# EAGLE board StepperSynth2.3_Motor (EAGLE 9.2.2)
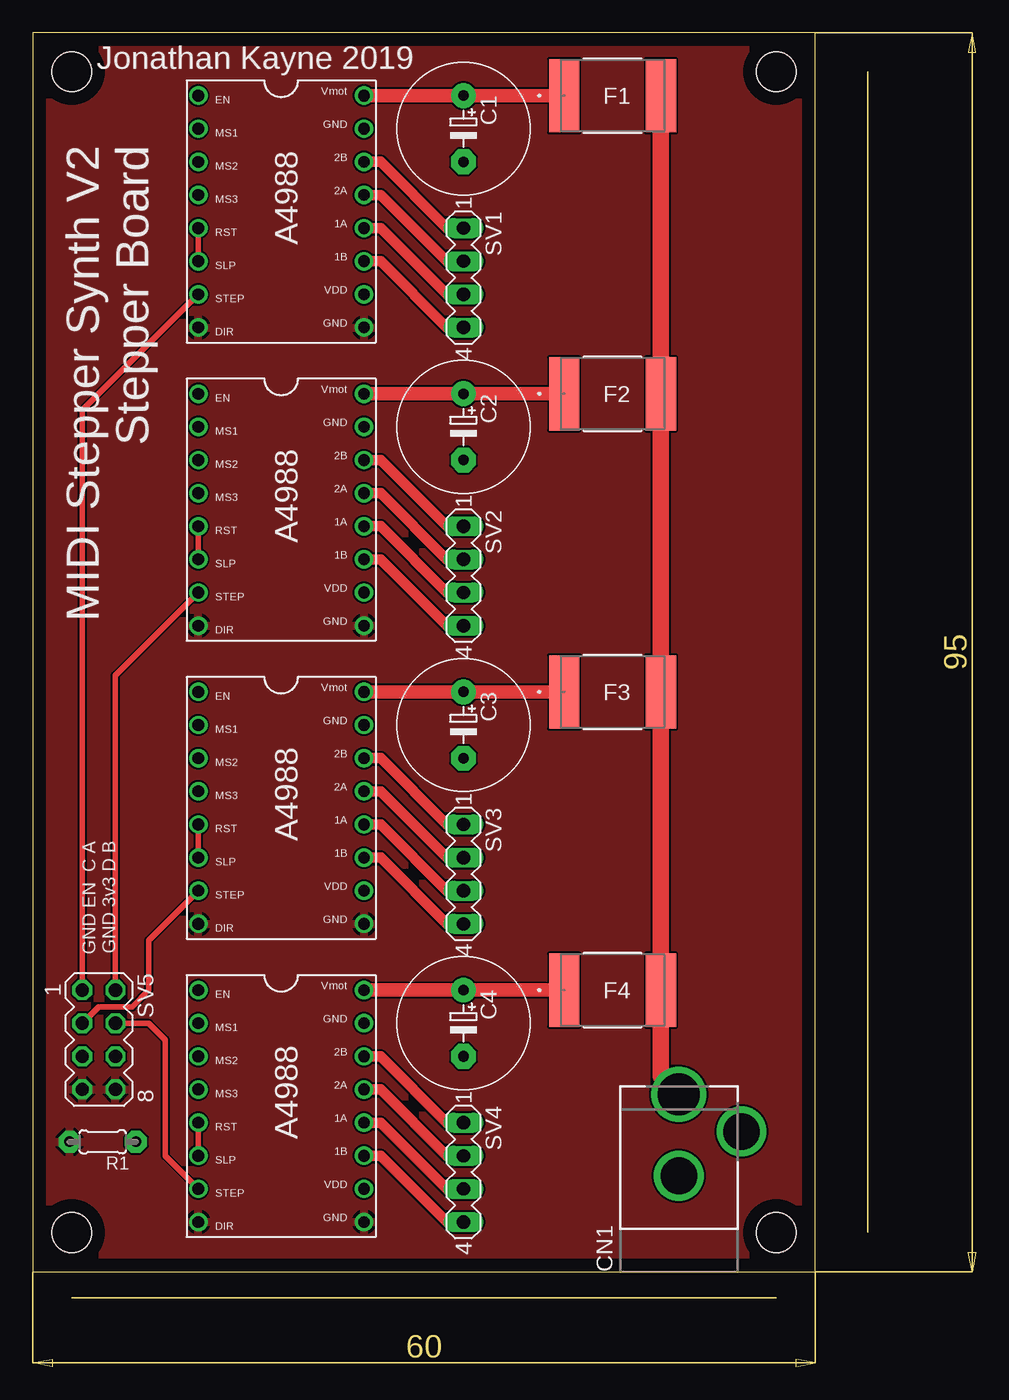
[diagram p0: board, top side]
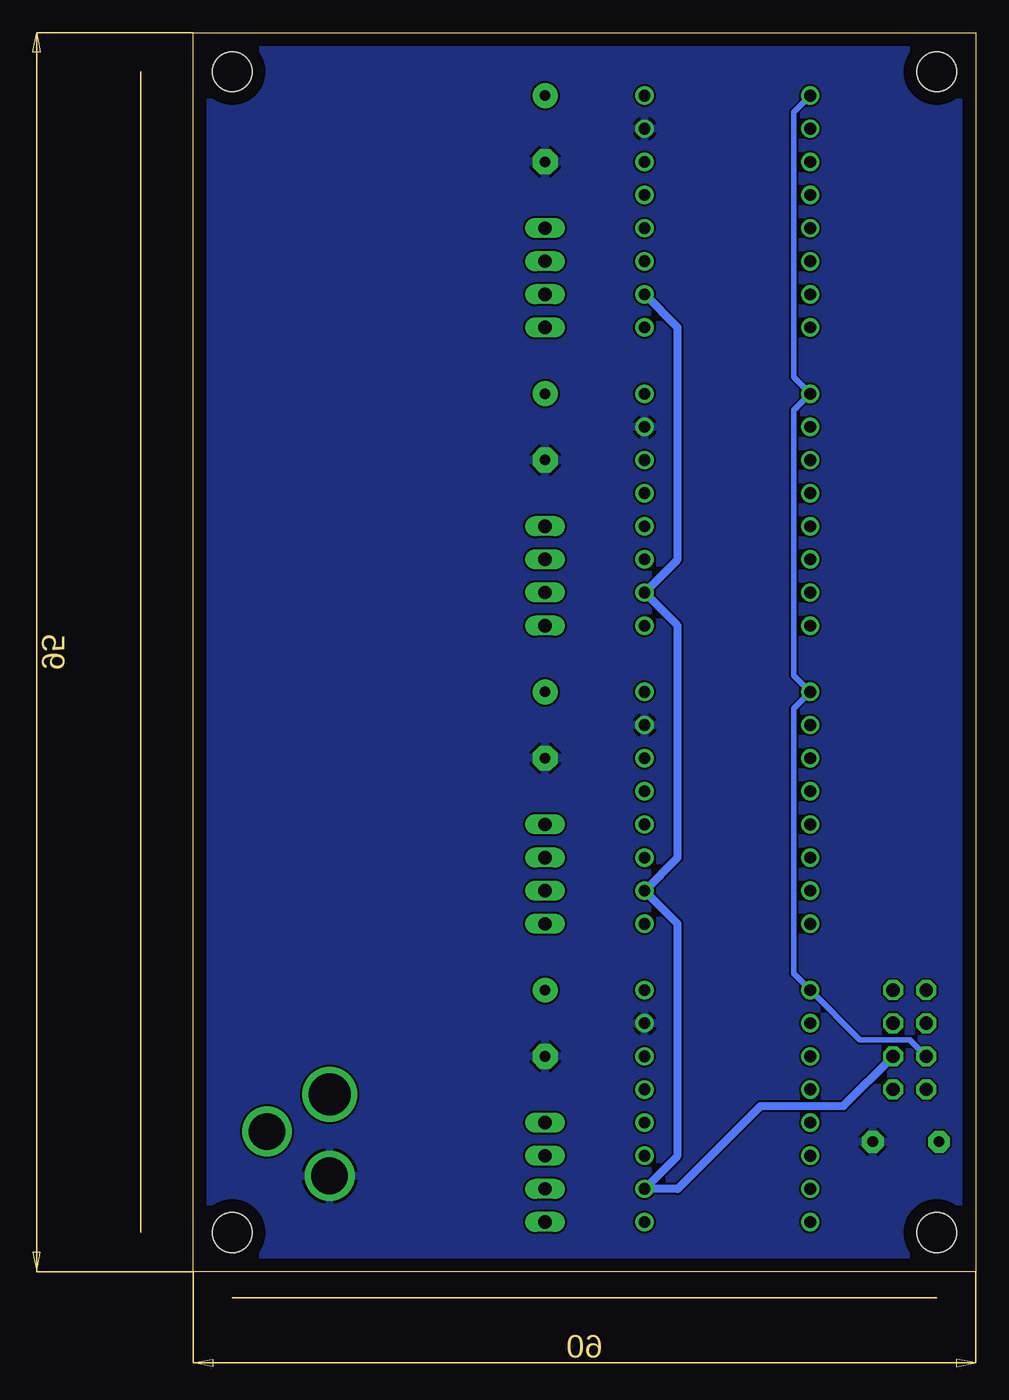
[diagram p1: board, bottom side, seen from below]

Size 60 x 95 mm. Coordinates in mm from the lower left corner, seen from the top.
Outline: 0,0 60,0 60,95 0,95 0,0
Copper layers (1*16): Top 0.035mm / dielectric 1.5mm / Bottom 0.035mm
Design rules "default": minimum track width 6mil, minimum drill 0.35mm, track to track 6mil, track to pad 6mil, pad to pad 6mil, via to via 6mil, smd to smd 6mil, copper to edge 40mil, drill to drill 6mil, minimum pad ring 10mil, minimum via ring 8mil, stop-mask expansion 4mil, vias tented up to drill 0mil, thermal gap 10mil
Holes 3.05 mm at 3,3 3,92 57,3 57,92

## Footprints (pad centres in the part's own frame; a part is rotated, then mirrored left to right if it is on the bottom)
E5-10 = drill 0.813 pad 1.905: + -2.54,0 | drill 0.813 pad 1.905 octagon: - 2.54,0
DCJACK_2MM_PTH = drill 2.8: GND 0,7.35; GNDBREAK 4.8,10.75 | drill 3.2: PWR 0,13.6
0ZCF = smd 2.311 x 5.613: 1 -3.708,0; 2 3.708,0
0204/5 = drill 0.813 pad 1.676 octagon: 1 -2.54,0; 2 2.54,0
MA04-1 = drill 1.016 long: 1 -3.81,0; 2 -1.27,0; 3 1.27,0; 4 3.81,0
MA04-2 = drill 1.016 octagon: 1 -3.81,-1.27; 2 -3.81,1.27; 3 -1.27,-1.27; 4 -1.27,1.27; 5 1.27,-1.27; 6 1.27,1.27; 7 3.81,-1.27; 8 3.81,1.27
A4988BREAKOUT = drill 0.9: 1A 8.89,1.27; 1B 11.43,1.27; 2A 6.35,1.27; 2B 3.81,1.27; DIR 16.51,-11.43; EN -1.27,-11.43; GND 16.51,1.27; MOTGND 1.27,1.27; MS1 1.27,-11.43; MS2 3.81,-11.43; MS3 6.35,-11.43; RST 8.89,-11.43; SLP 11.43,-11.43; STEP 13.97,-11.43; VDD 13.97,1.27; VMOT -1.27,1.27

## Placement (x,y rotation side)
C1  47uF  [E5-10]  33.02,87.63 270 top
C2  47uF  [E5-10]  33.02,64.77 270 top
C3  47uF  [E5-10]  33.02,41.91 270 top
C4  47uF  [E5-10]  33.02,19.05 270 top
CN1  [DCJACK_2MM_PTH]  49.53,0 0 top
F1  PTC2920_0ZCF  [0ZCF]  44.45,90.17 0 top
F2  PTC2920_0ZCF  [0ZCF]  44.45,67.31 0 top
F3  PTC2920_0ZCF  [0ZCF]  44.45,44.45 0 top
F4  PTC2920_0ZCF  [0ZCF]  44.45,21.59 0 top
R1  0  [0204/5]  5.37,9.96 180 top
SV1  [MA04-1]  33.02,76.2 270 top
SV2  [MA04-1]  33.02,53.34 270 top
SV3  [MA04-1]  33.02,30.48 270 top
SV4  [MA04-1]  33.02,7.62 270 top
SV5  [MA04-2]  5.08,17.78 270 top
U$1  A4988BREAKOUT  [A4988BREAKOUT]  24.13,88.9 270 top
U$2  A4988BREAKOUT  [A4988BREAKOUT]  24.13,66.04 270 top
U$3  A4988BREAKOUT  [A4988BREAKOUT]  24.13,43.18 270 top
U$4  A4988BREAKOUT  [A4988BREAKOUT]  24.13,20.32 270 top

## Library data of the parts
C1-C4 = Capacitor
CN1 R1 = adafruit
F1-F4 = PTC Fuse - 0ZCF0150FF2C; MANUFACTURER_PART_NUMBER: 0ZCF0150FF2C; VENDOR: Belfuse
SV1-SV5 = con-lstb; OC_FARNELL: unknown; OC_NEWARK: unknown
U$1-U$4 = RepRapjr

## Nets
+3V3: SV5.6 U$1.VDD U$2.VDD U$3.VDD U$4.VDD
+12V: CN1.PWR F1.2 F2.2 F3.2 F4.2
AGND: C1.- C2.- C3.- C4.- CN1.GND R1.1 U$1.MOTGND U$2.MOTGND U$3.MOTGND U$4.MOTGND
DGND: R1.2 SV5.7 SV5.8 U$1.DIR U$1.GND U$2.DIR U$2.GND U$3.DIR U$3.GND U$4.DIR U$4.GND
EN: SV5.5 U$1.EN U$2.EN U$3.EN U$4.EN
GNDBREAK: CN1.GNDBREAK
N$1: SV1.1 U$1.2B
N$2: SV1.2 U$1.2A
N$3: SV1.3 U$1.1A
N$4: SV1.4 U$1.1B
N$5: U$1.RST U$1.SLP
N$6: C1.+ F1.1 U$1.VMOT
N$7: SV2.1 U$2.2B
N$8: SV2.2 U$2.2A
N$9: SV2.3 U$2.1A
N$10: SV2.4 U$2.1B
N$11: U$2.RST U$2.SLP
N$12: C2.+ F2.1 U$2.VMOT
N$13: SV3.1 U$3.2B
N$14: SV3.2 U$3.2A
N$15: SV3.3 U$3.1A
N$16: SV3.4 U$3.1B
N$17: U$3.RST U$3.SLP
N$18: C3.+ F3.1 U$3.VMOT
N$19: SV4.1 U$4.2B
N$20: SV4.2 U$4.2A
N$21: SV4.3 U$4.1A
N$22: SV4.4 U$4.1B
N$23: U$4.RST U$4.SLP
N$24: C4.+ F4.1 U$4.VMOT
STEP_A: SV5.1 U$1.STEP
STEP_B: SV5.2 U$2.STEP
STEP_C: SV5.3 U$3.STEP
STEP_D: SV5.4 U$4.STEP

## Tracks (layer width: path | path; a pad name or v marks a point on that pad's centre or on a via)
+3V3
  Bottom 0.61: U$1.VDD 22.86,72.39 22.86,54.61 U$2.VDD 22.86,49.53 22.86,31.75 U$3.VDD 22.86,26.67 22.86,8.89 U$4.VDD 22.86,6.35 16.51,12.7 10.16,12.7 SV5.6
+12V
  Top 1.27: F1.2 48.16,69.95 48.26,69.85 48.26,67.41 F2.2 F3.2 F4.2 48.16,14.97 CN1.PWR
AGND
  pour Bottom: -1.27,-1.27 62.23,-1.27 62.23,96.52 -1.27,96.52
DGND
  pour Top: -1.27,-1.27 62.23,-1.27 62.23,96.52 -1.27,96.52
EN
  Bottom 0.406: SV5.5 5.08,17.78 8.89,17.78 U$4.EN 13.97,22.86 13.97,43.18 U$3.EN 13.97,45.72 13.97,66.04 U$2.EN 13.97,68.58 13.97,88.9 U$1.EN
N$1
  Top 0.813: U$1.2B 26.67,85.09 31.75,80.01 SV1.1
N$2
  Top 0.813: U$1.2A 26.67,82.55 31.75,77.47 SV1.2
N$3
  Top 0.813: U$1.1A 26.67,80.01 31.75,74.93 SV1.3
N$4
  Top 0.813: U$1.1B 26.67,77.47 31.75,72.39 SV1.4
N$5
  Top 0.406: U$1.RST U$1.SLP
N$6
  Top 0.813: U$1.VMOT C1.+ F1.1
  Top 1.016: F1.1 U$1.VMOT
N$7
  Top 0.813: U$2.2B 26.67,62.23 31.75,57.15 SV2.1
N$8
  Top 0.813: U$2.2A 26.67,59.69 31.75,54.61 SV2.2
N$9
  Top 0.813: U$2.1A 26.67,57.15 31.75,52.07 SV2.3
N$10
  Top 0.813: U$2.1B 26.67,54.61 31.75,49.53 SV2.4
N$11
  Top 0.406: U$2.RST U$2.SLP
N$12
  Top 0.813: U$2.VMOT C2.+ F2.1
  Top 1.016: F2.1 U$2.VMOT
N$13
  Top 0.813: U$3.2B 26.67,39.37 31.75,34.29 SV3.1
N$14
  Top 0.813: U$3.2A 26.67,36.83 31.75,31.75 SV3.2
N$15
  Top 0.813: U$3.1A 26.67,34.29 31.75,29.21 SV3.3
N$16
  Top 0.813: U$3.1B 26.67,31.75 31.75,26.67 SV3.4
N$17
  Top 0.406: U$3.SLP U$3.RST
N$18
  Top 0.813: U$3.VMOT C3.+ F3.1
  Top 1.016: F3.1 U$3.VMOT
N$19
  Top 0.813: U$4.2B 26.67,16.51 31.75,11.43 SV4.1
N$20
  Top 0.813: U$4.2A 26.67,13.97 31.75,8.89 SV4.2
N$21
  Top 0.813: U$4.1A 26.67,11.43 31.75,6.35 SV4.3
N$22
  Top 0.813: U$4.1B 26.67,8.89 31.75,3.81 SV4.4
N$23
  Top 0.406: U$4.SLP U$4.RST
N$24
  Top 0.813: 40.64,21.59 F4.1
  Top 1.016: U$4.VMOT C4.+ 40.64,21.59
STEP_A
  Top 0.406: U$1.STEP 3.81,66.04 SV5.1
STEP_B
  Top 0.406: U$2.STEP 6.35,45.72 SV5.2
STEP_C
  Top 0.406: SV5.3 5.08,20.32 7.62,20.32 8.89,21.59 8.89,25.4 U$3.STEP
STEP_D
  Top 0.406: SV5.4 8.89,19.05 10.16,17.78 10.16,8.89 U$4.STEP

## Text on the board
tPlace: Jonathan Kayne 2019 | MIDI Stepper Synth V2 / Stepper Board | A4988 | A4988 | GND EN C A / GND 3v3 D B | A4988 | A4988